# Altium PCB photodiodeAmplifier.PcbDoc
Units mm, origin at the board's own origin, x right, y up, seen from the top; angles counter-clockwise.
Board outline 13.46 x 12.06 mm, 2 copper layers (Top Layer, Bottom Layer); 7 components, 5 nets, 26 pads, 0 vias.
Unrouted connection lines stored in the file: 8.
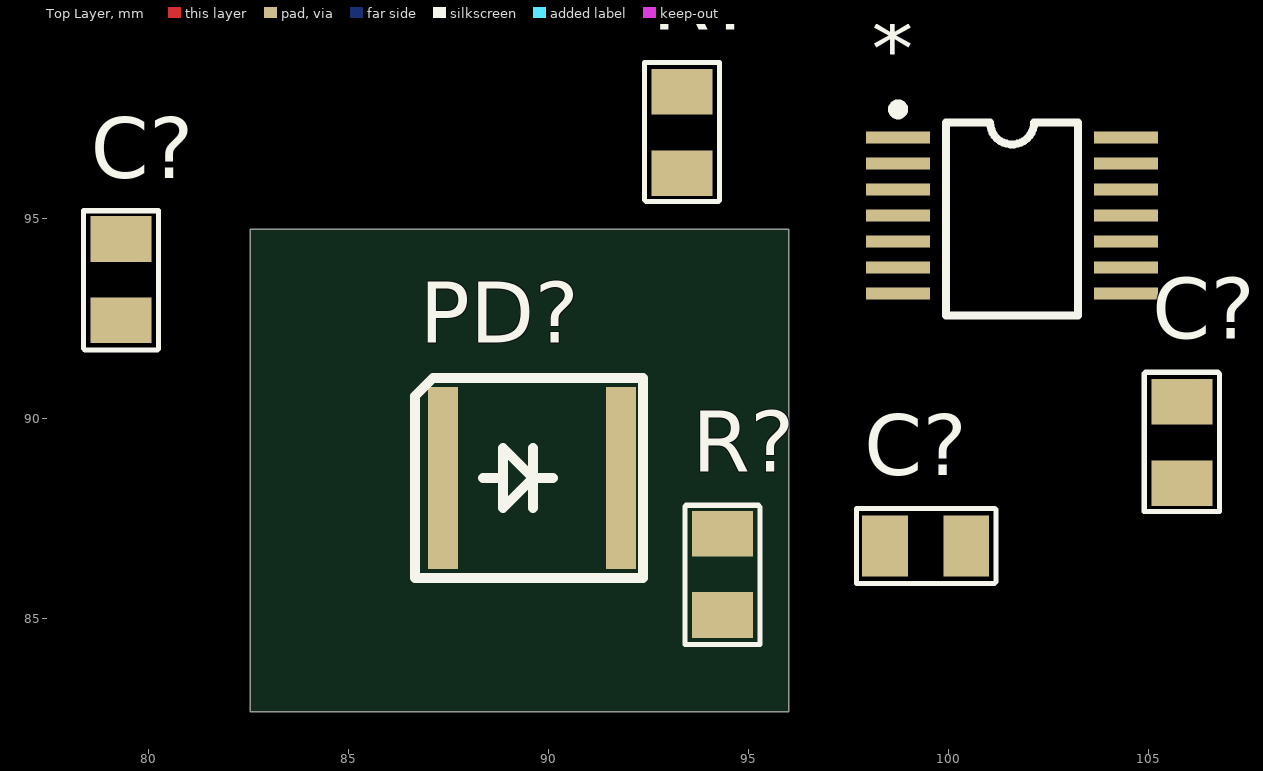
[diagram p0: Top Layer view]
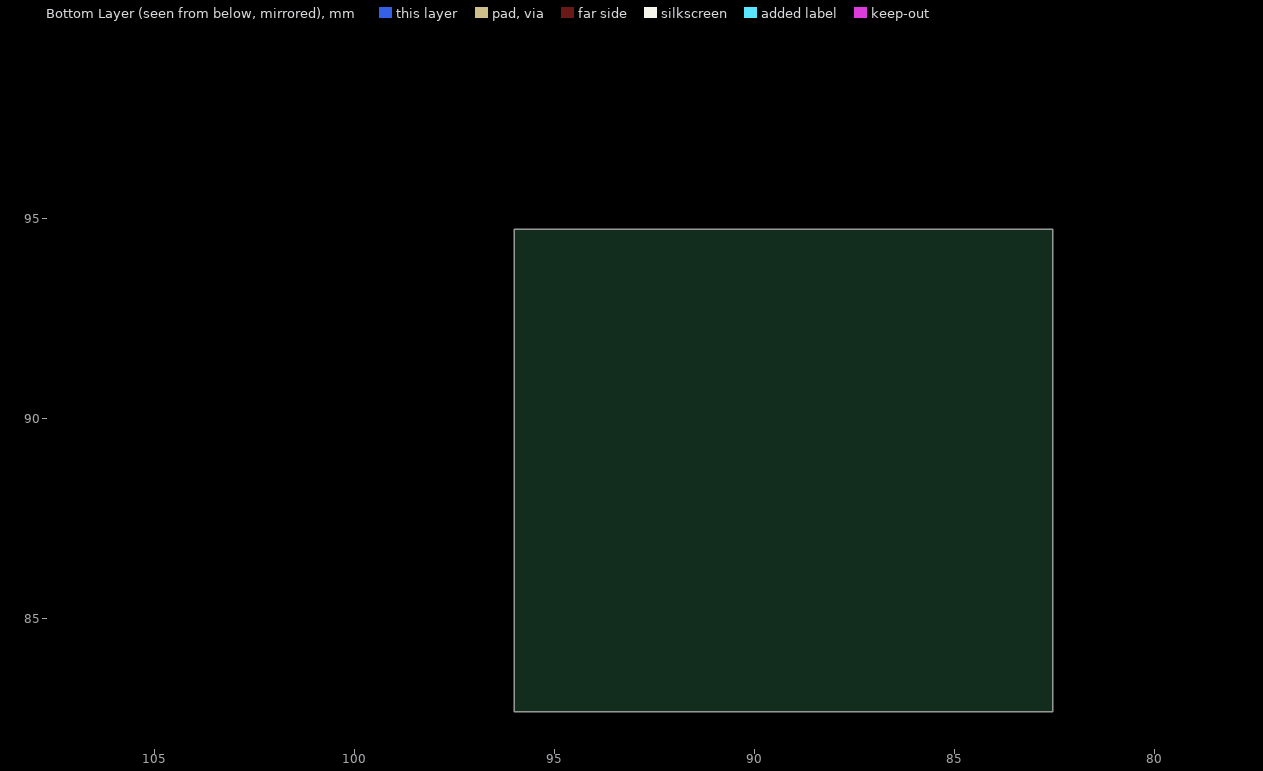
[diagram p1: Bottom Layer view, seen from below]

## Layer stack, top to bottom
Top Solder: solder mask 0.0102, Solder Resist, Dk 3.5
Top Layer: signal copper 0.0356
Dielectric 1: dielectric 0.32, FR-4, Dk 4.8
Bottom Layer: signal copper 0.0356
Bottom Solder: solder mask 0.0102, Solder Resist, Dk 3.5

## Board outline
82.55,94.742 96.012,94.742 96.012,82.677 82.55,82.677

## Design rules (kind name [scope] priority, off if disabled: settings)
Clearance [All] p1: gap=0.254 ignorepadtopadclearanceinfootprint=FALSE except(0: Arc-Hole Track-Hole SMDPad-Hole THPad-Hole Via-Hole Fill-Hole Poly-Hole Region-Hole Text-Hole)
PolygonConnect [All] p1: connectstyle=Relief reliefconductorwidth=0.254 reliefentries=4 polygonreliefangle="90 Angle" airgapwidth=0.254
RoutingVias [All] p1: holewidth=0.711 width=1.27 viastyle="Through Hole" minholewidth=0.711 minwidth=1.27 maxholewidth=0.711 maxwidth=1.27
SolderMaskExpansion [All] p1: expansion=0.102 istentingtop=FALSE
Width [All] p1: maxlimit=0.254 minlimit=0.254 preferedwidth=0.254
30 further rules are at their usual default settings.

## Classes and differential pairs
component class photodiodeAmplifier: * C? PD? R?

## Components (designator, comment, footprint, x,y, rotation, side; value= is the part's Value field where it differs from the comment)
* "TSZ124" TSSOP14 101.6,94.107 r270 top
C? "100 nF" "CAP 0805" 79.502,93.599 r270 top value="5 pF"
C? "100 nF" "CAP 0805" 99.314,86.995 r0 top value="5 pF"
C? "100 nF" "CAP 0805" 105.664,89.281 r90 top value="5 pF"
PD? "TEMD5080X01" "Photodiode SMD PKG-1" 87.371,88.519 r90 top
R? "RES 0805" "RES 0805" 93.658,96.165 r270 top value=100k
R? "RES 0805" "RES 0805" 94.048,87.096 r90 top value=10k

## Footprints (in the part's own frame and the unit in brackets; to place one, negate y for a bottom-side part, rotate by r counter-clockwise, add the part's x,y. Pads: shape width x height; smd on the part's side, far side on the other; paste and mask are expansions set on the pad)
"CAP 0805" [mil]
  rect 45x60 smd: 1(44.84,-7.2) 2(-35.16,-7.2)
  silkscreen extent -63,-44 74,30, body extent -35,-32 44,17, height 31
"Photodiode SMD PKG-1" [mm] "package type 1 -"
  rect 4.55x0.75 smd: 1(0,0) 2(0,-4.45)
  silkscreen extent -2.5,-5 2.5,0.7, body extent -2.15,-4.75 2.05,0.25, height 1.12
"RES 0805" [mil]
  rect 45x60 smd: 1(1.02,-12.32) 2(-78.98,-12.32)
  silkscreen extent -108,-49 29,25, body extent -84,-39 6,14, height 30
TSSOP14 [mm] "Shrink Small Outline; 14 Leads; Body Width 4.4 mm; Pitch 0.65 mm"
  rect 0.3x1.6 smd: 1(-2.925,-2.85) 2(-2.275,-2.85) 3(-1.625,-2.85) 4(-0.975,-2.85) 5(-0.325,-2.85) 6(0.325,-2.85) 7(0.975,-2.85) 8(0.975,2.85) 9(0.325,2.85) 10(-0.325,2.85) 11(-0.975,2.85) 12(-1.625,2.85) 13(-2.275,2.85) 14(-2.925,2.85)
  silkscreen extent -3.75,-2.97 1.52,1.65, body extent -3.43,-1.91 1.65,1.91, height 1.2

## Part data
C? C? C?: library part "CAP 0805"
PD?: "PIN Sillicium photodiode."
R? R?: "SMD Resistor 0805"

## Nets (pads, with @x,y where several pads share a name; then routed paths per layer and width w, separated by ;. In a path a pad name is that pad's centre, name@x,y a point inside that pad or via, vN(x,y) a via of type N, cw(c..) or ccw(c..) an arc to the next point about the centre after c; other vN are vias at no path point)
GND: *.3 *.11 PD?.1
Net*_1: *.1 C?.2@79.319,94.492 R?.2@93.345,98.171
Net*_2: *.2 C?.1@79.319,92.46 PD?.2 R?.1@93.345,96.139
NetC?_2: C?.2@98.421,86.812 R?.2@94.361,85.09
VCC: *.4
pads on no net: *.5 *.6 *.7 *.8 *.9 *.10 *.12 *.13 *.14 C?.1@100.453,86.812 C?.1@105.847,90.42 C?.2@105.847,88.388 R?.1@94.361,87.122